# Altium PCB Monitor_Board_Model_H201.PcbDoc (part 3 of 5)
Units mm, origin at the board's own origin, x right, y up, seen from the top; angles counter-clockwise.
Board outline 50 x 40 mm, 6 copper layers (1-SIG-TOP, 2-GND, 3-PWR, 4-SIG-HOR, 5-SIG-VERT, 6-GND-BOT), stack 1.17 mm thick; 210 components, 140 nets, 699 pads, 51 vias.
Unrouted connection lines stored in the file: 491.
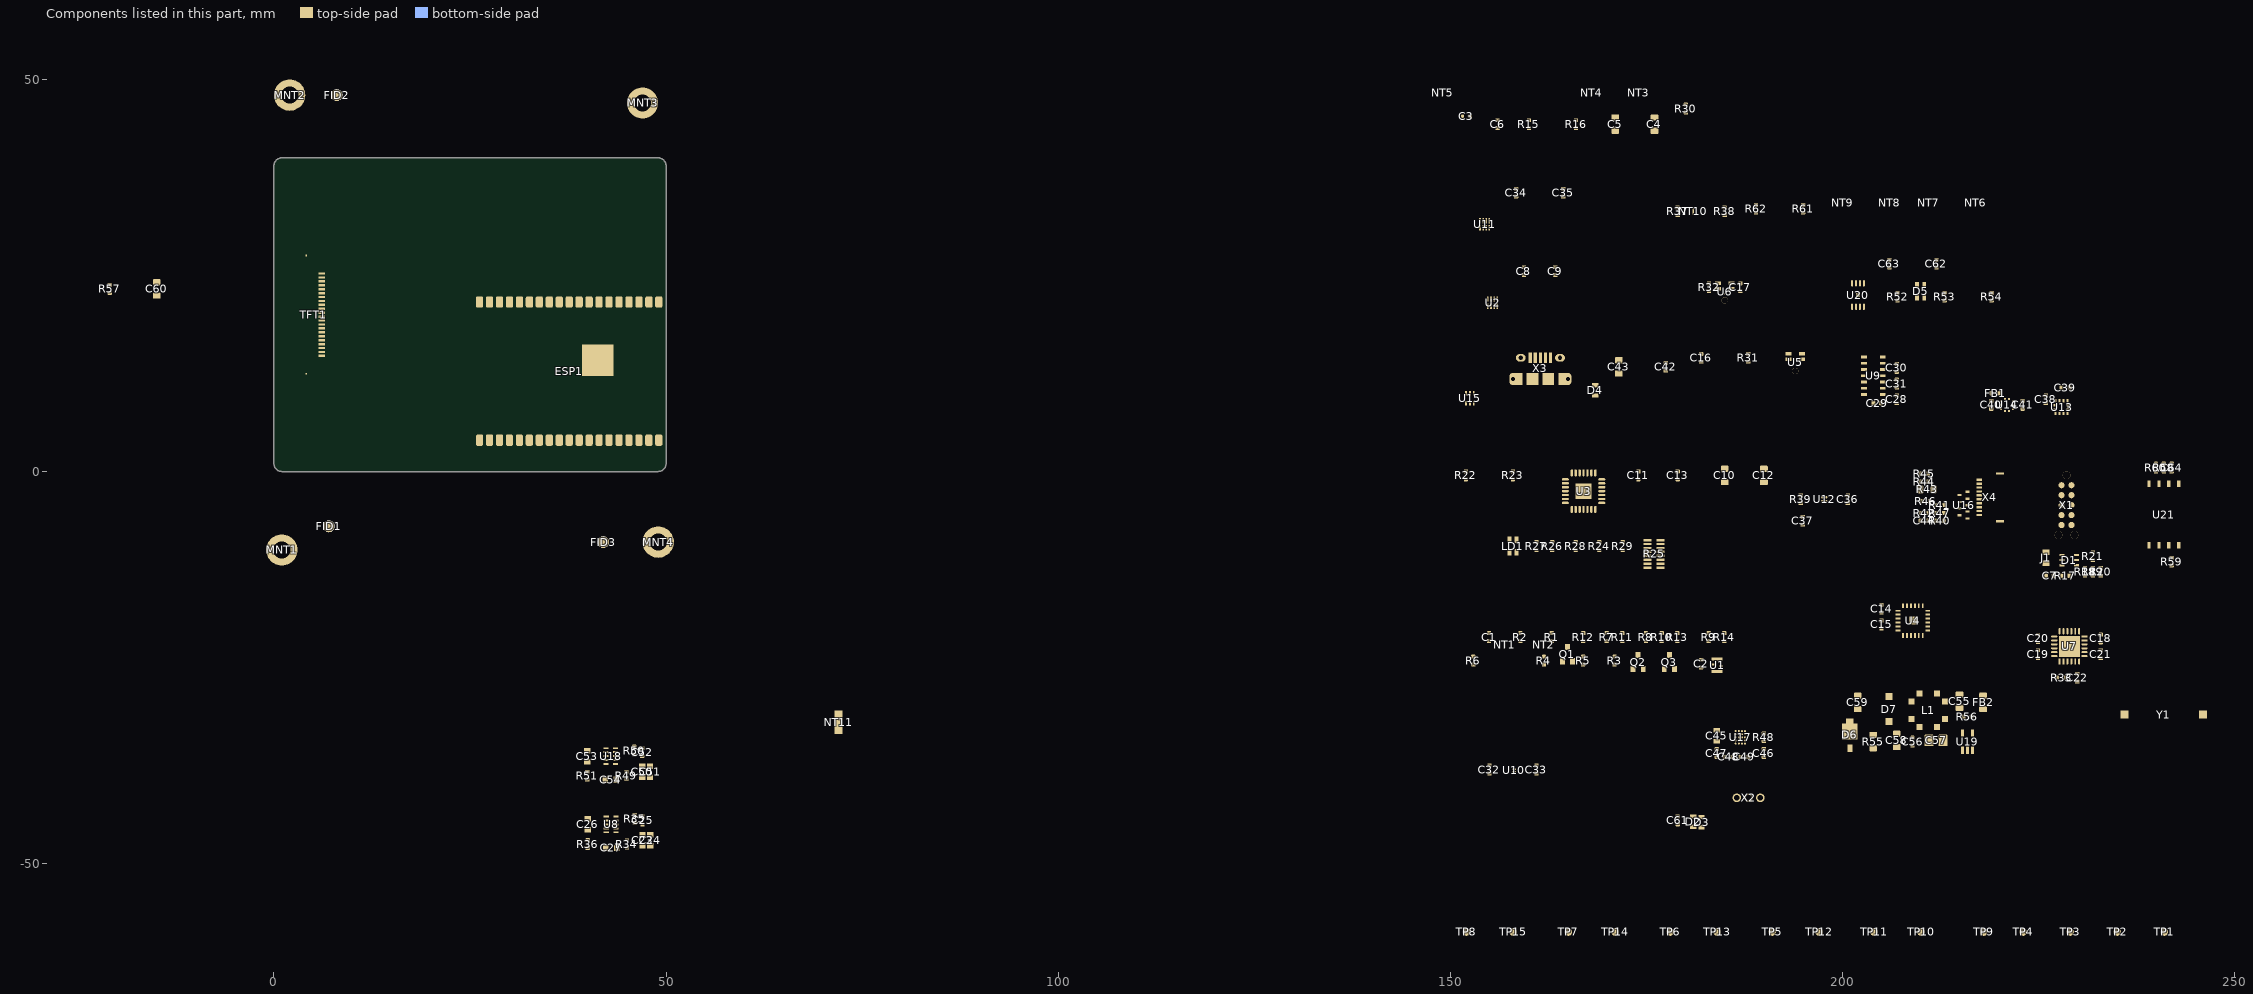
[diagram p6: the components of this part, seen from the top]

## Part data (continued)
R1: "0 Ohms Jumper 0.063W, 1/16W Chip Resistor 0402 (1005 Metric) Moisture Resistant Thick Film", Case/Package=0402, Case Code (Metric)=1005, Manufacturer=Yageo, Manufacturer Part Number=RC0402JR-070RL, Max Operating Temperature=155°C, Max Power Dissipation=63mW, Min Operating Temperature=-55°C, Package Quantity=1, Power Rating=62.5mW, Resistance="0 Ohm", Supplier Part Number 1=311-0.0JRCT-ND, Temperature Coefficient=200ppm/°C, Tolerance=5%, Voltage Rating=50V, Case Code (Imperial)=0402, ClassName=U_ESP32-WROOM32D_Module, ComponentLink1Description=http://www.yageo.com/documents/recent/PYu-RC_Group_51_RoHS_L_10.pdf?src-supplier=Digi-Key, ComponentLink1URL=http://www.yageo.com/documents/recent/PYu-RC_Group_51_RoHS_L_10.pdf?src-supplier=Digi-Key, ComponentLink2Description=http://www.yageo.com/documents/recent/PYu-RC0402_51_RoHS_L_6.pdf?src-supplier=Avnet+Europe, ComponentLink2URL=http://www.yageo.com/documents/recent/PYu-RC0402_51_RoHS_L_6.pdf?src-supplier=Avnet+Europe, ComponentLink3Description=http://www.farnell.com/datasheets/1018594.pdf?src-supplier=Element14, ComponentLink3URL=http://www.farnell.com/datasheets/1018594.pdf?src-supplier=Element14, ComponentLink4Description=https://www.verical.com/server-webapp/html/getDatasheet?partID=326379&src-supplier=Verical, ComponentLink4URL=https://www.verical.com/server-webapp/html/getDatasheet?partID=326379&src-supplier=Verical, ComponentLink5Description=http://www.farnell.com/datasheets/2167052.pdf?src-supplier=Element14, ComponentLink5URL=http://www.farnell.com/datasheets/2167052.pdf?src-supplier=Element14, Composition="Thick Film", Contact Plating=Tin,Matte, Depth=0.5mm, Features="Moisture Resistant", Height=0.016inch, Lead Free="Lead Free", Length=1mm, Military Standard=Not, Mount="Surface Mount", Number of Terminations=2, Packaging="Tape and Reel", Pricing 1="1=0.1, 10=0.013, 25=0.0092, 50=0.0072, 100=0.0053, 250=0.004, 500=0.0032, 1000=0.0024, 5000=0.0017 (USD)", Radiation Hardening=No, REACH SVHC=Unknown, Stock 1=46057148, Supplier 1=Digi-Key, Termination=SMD/SMT, Width=0.02inch
R2 R3 R4 R16 R26 R39 R40 R58 R59 R60: "10 kOhms ±1% 0.063W, 1/16W Chip Resistor 0402 (1005 Metric) Moisture Resistant Thick Film", Case/Package=0402, Case Code (Metric)=1005, Manufacturer=Yageo, Manufacturer Part Number=RC0402FR-0710KP, Max Operating Temperature=155°C, Max Power Dissipation=63mW, Min Operating Temperature=-55°C, Resistance=10kR, Supplier Part Number 1=YAG1249CT-ND, Temperature Coefficient=150ppm/°C, Tolerance=1%, Case Code (Imperial)=0402, ComponentLink1Description=http://www.yageo.com/NewPortal/yageodocoutput?fileName=/pdf/R-Chip/PYu-RC_51_RoHS_P_0.pdf&src-supplier=Digi-Key, ComponentLink1URL=http://www.yageo.com/NewPortal/yageodocoutput?fileName=/pdf/R-Chip/PYu-RC_51_RoHS_P_0.pdf&src-supplier=Digi-Key, Composition="Thick Film", Features="Moisture Resistant", Height=0.016inch, Length=0.039inch, Number of Terminations=2, Packaging="Tape and Reel", Pricing 1="1=0.1, 10=0.035, 100=0.014, 1000=0.0063, 2500=0.0055, 5000=0.0045 (USD)", Stock 1=839368, Supplier 1=Digi-Key, Width=0.02inch
  R2 R3 R4: ClassName=U_ESP32-WROOM32D_Module, Mount="Surface Mount"
  R16 R26 R39 R58 R59 R60: Mount="Surface Mount"
R5 R6 R15 R17 R18 R19 R20 R21 R30 R31 R32: "100 Ohms ±1% 0.063W, 1/16W Chip Resistor 0402 (1005 Metric) Moisture Resistant Thick Film", Case/Package=0402, Case Code (Metric)=1005, Manufacturer=Yageo, Manufacturer Part Number=RC0402FR-07100RL, Max Operating Temperature=155°C, Min Operating Temperature=-55°C, Power Rating=62.5mW, Resistance=100R, Supplier Part Number 1=311-100LRDKR-ND, Temperature Coefficient=100ppm/°C, Tolerance=1%, Voltage Rating=50V, Case Code (Imperial)=0402, ComponentLink1Description=http://www.farnell.com/datasheets/2167052.pdf?src-supplier=Element14, ComponentLink1URL=http://www.farnell.com/datasheets/2167052.pdf?src-supplier=Element14, ComponentLink2Description=http://www.yageo.com/documents/recent/PYu-RC_Group_51_RoHS_L_9.pdf?src-supplier=Mouser, ComponentLink2URL=http://www.yageo.com/documents/recent/PYu-RC_Group_51_RoHS_L_9.pdf?src-supplier=Mouser, ComponentLink3Description=http://www.yageo.com/documents/recent/PYu-RC0402_51_RoHS_L_6_r.pdf?src-supplier=Future+Electronics, ComponentLink3URL=http://www.yageo.com/documents/recent/PYu-RC0402_51_RoHS_L_6_r.pdf?src-supplier=Future+Electronics, ComponentLink4Description=https://www.verical.com/server-webapp/html/getDatasheet?partID=329466&src-supplier=Verical, ComponentLink4URL=https://www.verical.com/server-webapp/html/getDatasheet?partID=329466&src-supplier=Verical, ComponentLink5Description=http://www.farnell.com/datasheets/1018594.pdf?src-supplier=Element14, ComponentLink5URL=http://www.farnell.com/datasheets/1018594.pdf?src-supplier=Element14, ComponentLink6Description=http://documents.rs-components.com/techlib://itc_doclist_GB.htm?stockno=6185810&src-supplier=RSComponents, ComponentLink6URL=http://documents.rs-components.com/techlib://itc_doclist_GB.htm?stockno=6185810&src-supplier=RSComponents, Composition="Thick Film", Depth=0.5mm, Height=0.32mm, Lead Free="Lead Free", Length=1mm, Military Standard=Not, Number of Pins=2, Packaging="Tape and Reel", Pricing 1="1=0.1, 10=0.016, 100=0.0064, 1000=0.0029, 2500=0.0025, 5000=0.0021 (USD)", REACH SVHC="No SVHC", Stock 1=16989760, Supplier 1=Digi-Key, Termination=SMD/SMT, Voltage Rating (DC)=50V, Width=0.5mm
  R15 R17 R18 R19 R20 R21: Mount="Surface Mount"
R7 R8 R13 R14 R37 R38 R46: "2.7 kOhms ±1% 0.063W, 1/16W Chip Resistor 0402 (1005 Metric) Moisture Resistant Thick Film", Case/Package=0402, Case Code (Metric)=1005, Manufacturer=Yageo, Manufacturer Part Number=RC0402FR-072K7L, Max Operating Temperature=155°C, Max Power Dissipation=63mW, Min Operating Temperature=-55°C, Package Quantity=1, Resistance=2.7kR, Supplier Part Number 1=311-2.70KLRCT-ND, Temperature Coefficient=100ppm/°C, Tolerance=1%, Voltage Rating=50V, Case Code (Imperial)=0402, ComponentLink1Description=http://www.mouser.com/ds/2/447/PYu-RC0402_51_RoHS_L_6_r-8721.pdf?src-supplier=Mouser, ComponentLink1URL=http://www.mouser.com/ds/2/447/PYu-RC0402_51_RoHS_L_6_r-8721.pdf?src-supplier=Mouser, ComponentLink2Description=http://www.yageo.com/documents/recent/PYu-RC_Group_51_RoHS_L_9.pdf?src-supplier=Digi-Key, ComponentLink2URL=http://www.yageo.com/documents/recent/PYu-RC_Group_51_RoHS_L_9.pdf?src-supplier=Digi-Key, ComponentLink3Description=http://www.yageo.com/documents/recent/PYu-RC_Group_51_RoHS_L_10.pdf?src-supplier=Digi-Key, ComponentLink3URL=http://www.yageo.com/documents/recent/PYu-RC_Group_51_RoHS_L_10.pdf?src-supplier=Digi-Key, ComponentLink4Description=http://www.farnell.com/datasheets/2167052.pdf?src-supplier=Element14, ComponentLink4URL=http://www.farnell.com/datasheets/2167052.pdf?src-supplier=Element14, Composition="Thick Film", Depth=0.5mm, Features="Moisture Resistant", Height=0.016inch, Lead Free="Lead Free", Length=1mm, Military Standard=Not, Number of Terminations=2, Packaging="Tape and Reel", Power Rating=63mW, Pricing 1="1=0.1, 10=0.016, 100=0.0064, 1000=0.0029, 2500=0.0025, 5000=0.0021 (USD)", REACH SVHC=Unknown, Stock 1=261850, Supplier 1=Digi-Key, Termination=SMD/SMT, Width=0.02inch, Working Voltage=50V
  R7 R8 R13 R14 R37 R38: ClassName=U_ESP32-WROOM32D_Module
R9 R10 R11 R12: "100 kOhms ±1% 0.063W, 1/16W Chip Resistor 0402 (1005 Metric) Moisture Resistant Thick Film", Case/Package=0402, Case Code (Metric)=1005, Manufacturer=Yageo, Manufacturer Part Number=RC0402FR-07100KL, Max Operating Temperature=155°C, Max Power Dissipation=63mW, Min Operating Temperature=-55°C, Package Quantity=1, Resistance="100 kOhm", Supplier Part Number 1=311-100KLRDKR-ND, Temperature Coefficient=100ppm/°C, Tolerance=1%, Voltage Rating=50V, Case Code (Imperial)=0402, ComponentLink1Description=http://www.yageo.com/documents/recent/PYu-RC_Group_51_RoHS_L_10.pdf?src-supplier=Digi-Key, ComponentLink1URL=http://www.yageo.com/documents/recent/PYu-RC_Group_51_RoHS_L_10.pdf?src-supplier=Digi-Key, ComponentLink2Description=http://www.farnell.com/datasheets/1018594.pdf?src-supplier=Element14, ComponentLink2URL=http://www.farnell.com/datasheets/1018594.pdf?src-supplier=Element14, ComponentLink3Description=http://www.yageo.com/documents/recent/PYu-RC_Group_51_RoHS_L_9.pdf?src-supplier=Verical, ComponentLink3URL=http://www.yageo.com/documents/recent/PYu-RC_Group_51_RoHS_L_9.pdf?src-supplier=Verical, ComponentLink4Description=http://www.yageo.com/documents/recent/PYu-RC_Group_51_RoHS_L_9.pdf?src-supplier=Mouser, ComponentLink4URL=http://www.yageo.com/documents/recent/PYu-RC_Group_51_RoHS_L_9.pdf?src-supplier=Mouser, ComponentLink5Description=http://documents.rs-components.com/techlib://itc_doclist_GB.htm?stockno=6185797&src-supplier=RSComponents, ComponentLink5URL=http://documents.rs-components.com/techlib://itc_doclist_GB.htm?stockno=6185797&src-supplier=RSComponents, Composition="Thick Film", Depth=0.5mm, Features="Moisture Resistant", Height=0.016inch, Lead Free="Lead Free", Length=0.039inch, Military Standard=Not, Number of Terminations=2, Packaging="Tape and Reel", Power Rating=63mW, Pricing 1="1=0.1, 10=0.016, 100=0.0064, 1000=0.0029, 2500=0.0025, 5000=0.0021 (USD)", REACH SVHC="No SVHC", Stock 1=47448883, Supplier 1=Digi-Key, Termination=SMD/SMT, Width=0.02inch, Working Voltage=50V
R22: "47 kOhms ±1% 0.063W, 1/16W Chip Resistor 0402 (1005 Metric) Moisture Resistant Thick Film", Case/Package=0402, Case Code (Metric)=1005, Manufacturer=Yageo, Manufacturer Part Number=RC0402FR-0747KL, Max Operating Temperature=155°C, Max Power Dissipation=63mW, Min Operating Temperature=-55°C, Package Quantity=1, Power Rating=62.5mW, Resistance=47kR, Supplier Part Number 1=311-47.0KLRCT-ND, Temperature Coefficient=100ppm/°C, Tolerance=1%, Voltage Rating=50V, Case Code (Imperial)=0402, ComponentLink1Description=http://www.yageo.com/documents/recent/PYu-RC0402_51_RoHS_L_6_r.pdf?src-supplier=Future+Electronics, ComponentLink1URL=http://www.yageo.com/documents/recent/PYu-RC0402_51_RoHS_L_6_r.pdf?src-supplier=Future+Electronics, ComponentLink2Description=http://www.farnell.com/datasheets/1018594.pdf?src-supplier=Element14, ComponentLink2URL=http://www.farnell.com/datasheets/1018594.pdf?src-supplier=Element14, ComponentLink3Description=https://www.verical.com/server-webapp/html/getDatasheet?partID=323748&src-supplier=Verical, ComponentLink3URL=https://www.verical.com/server-webapp/html/getDatasheet?partID=323748&src-supplier=Verical, ComponentLink4Description=http://www.yageo.com/documents/recent/PYu-RC_Group_51_RoHS_L_10.pdf?src-supplier=Digi-Key, ComponentLink4URL=http://www.yageo.com/documents/recent/PYu-RC_Group_51_RoHS_L_10.pdf?src-supplier=Digi-Key, Composition="Thick Film", Depth=0.5mm, Features="Moisture Resistant", Height=0.016inch, Lead Free="Lead Free", Length=1mm, Military Standard=Not, Mount="Surface Mount", Number of Terminations=2, Packaging="Tape and Reel", Pricing 1="1=0.1, 10=0.015, 100=0.0062, 1000=0.0028, 2500=0.0024, 5000=0.002 (USD)", REACH SVHC=Unknown, Stock 1=0, Supplier 1=Digi-Key, Termination=SMD/SMT, Width=0.5mm
R23: "23.7 kOhms ±1% 0.063W, 1/16W Chip Resistor 0402 (1005 Metric) Moisture Resistant Thick Film", Case/Package=0402, Case Code (Metric)=1005, Manufacturer=Yageo, Manufacturer Part Number=RC0402FR-0723K7L, Max Operating Temperature=155°C, Max Power Dissipation=63mW, Min Operating Temperature=-55°C, Power Rating=62.5mW, Resistance=23.7kR, Supplier Part Number 1=YAG3067CT-ND, Temperature Coefficient=100ppm/°C, Tolerance=1%, Voltage Rating=50V, Case Code (Imperial)=0402, ComponentLink1Description=http://www.yageo.com/documents/recent/PYu-RC0402_51_RoHS_L_6.pdf?src-supplier=Avnet+Europe, ComponentLink1URL=http://www.yageo.com/documents/recent/PYu-RC0402_51_RoHS_L_6.pdf?src-supplier=Avnet+Europe, ComponentLink2Description=https://www.verical.com/server-webapp/html/getDatasheet?partID=325115&src-supplier=Verical, ComponentLink2URL=https://www.verical.com/server-webapp/html/getDatasheet?partID=325115&src-supplier=Verical, ComponentLink3Description=http://www.mouser.com/ds/2/447/PYu-RC0402_51_RoHS_L_6_r-8721.pdf?src-supplier=Mouser, ComponentLink3URL=http://www.mouser.com/ds/2/447/PYu-RC0402_51_RoHS_L_6_r-8721.pdf?src-supplier=Mouser, ComponentLink4Description=http://www.yageo.com/documents/recent/PYu-RC0402_51_RoHS_L_6.pdf?src-supplier=Avnet, ComponentLink4URL=http://www.yageo.com/documents/recent/PYu-RC0402_51_RoHS_L_6.pdf?src-supplier=Avnet, Composition="Thick Film", Contact Plating=Tin,Matte, Depth=0.5mm, Features="Moisture Resistant", Height=0.016inch, Lead Free="Lead Free", Length=1mm, Military Standard=Not, Mount="Surface Mount", Number of Terminations=2, Packaging="Tape and Reel", Pricing 1="1=0.1, 10=0.016, 100=0.0064, 1000=0.0029, 2500=0.0025, 5000=0.0021 (USD)", Radiation Hardening=No, Stock 1=58499, Supplier 1=Digi-Key, Termination=SMD/SMT, Voltage Rating (DC)=50V, Weight=2.3E-05oz, Width=0.02inch
R24 R47 R57: "1 kOhms ±1% 0.063W, 1/16W Chip Resistor 0402 (1005 Metric) Moisture Resistant Thick Film", Case/Package=0402, Case Code (Metric)=1005, Manufacturer=Yageo, Manufacturer Part Number=RC0402FR-071KL, Max Operating Temperature=155°C, Min Operating Temperature=-55°C, Power Rating=62.5mW, Resistance=1kR, Supplier Part Number 1=311-1.00KLRCT-ND, Temperature Coefficient=100ppm/°C, Tolerance=1%, Voltage Rating=50V, Case Code (Imperial)=0402, ComponentLink1Description=http://www.mouser.com/ds/2/447/PYu-RC0402_51_RoHS_L_6_r-8721.pdf?src-supplier=Mouser, ComponentLink1URL=http://www.mouser.com/ds/2/447/PYu-RC0402_51_RoHS_L_6_r-8721.pdf?src-supplier=Mouser, ComponentLink2Description=http://documents.rs-components.com/techlib://itc_doclist_GB.htm?stockno=6186122&src-supplier=RSComponents, ComponentLink2URL=http://documents.rs-components.com/techlib://itc_doclist_GB.htm?stockno=6186122&src-supplier=RSComponents, ComponentLink3Description=http://www.farnell.com/datasheets/1018594.pdf?src-supplier=Element14, ComponentLink3URL=http://www.farnell.com/datasheets/1018594.pdf?src-supplier=Element14, ComponentLink4Description=http://www.yageo.com/documents/recent/PYu-RC0402_51_RoHS_L_6_r.pdf?src-supplier=Future+Electronics, ComponentLink4URL=http://www.yageo.com/documents/recent/PYu-RC0402_51_RoHS_L_6_r.pdf?src-supplier=Future+Electronics, ComponentLink5Description=http://www.farnell.com/datasheets/2167052.pdf?src-supplier=Element14, ComponentLink5URL=http://www.farnell.com/datasheets/2167052.pdf?src-supplier=Element14, Composition="Thick Film", Depth=0.5mm, Height=0.32mm, Lead Free="Lead Free", Length=1mm, Military Standard=Not, Number of Pins=2, Packaging="Tape and Reel", Pricing 1="1=0.1, 10=0.015, 100=0.0062, 1000=0.0028, 2500=0.0024, 5000=0.002 (USD)", REACH SVHC=Unknown, Stock 1=9574509, Supplier 1=Digi-Key, Termination=SMD/SMT, Voltage Rating (DC)=50V, Width=0.5mm
  R57: Mount="Surface Mount"
R25: "100k Ohm ±5% 62.5mW Power Per Element Isolated  Resistor Network/Array ±200ppm/°C 1606, Convex, Long Side Terminals", Case/Package=0616, Case Code (Metric)=1640, Manufacturer=Yageo, Manufacturer Part Number=YC248-JR-07100KL, Max Operating Temperature=155°C, Min Operating Temperature=-55°C, Number of Resistors=8, Package Quantity=1, Power Per Element=62.5mW, Resistance=100kR, Supplier Part Number 1=YC248J-100KCT-ND, Temperature Coefficient=200ppm/°C, Tolerance=5%, Voltage Rating=50V, Case Code (Imperial)=0616, Circuit Type=Isolated, ComponentLink1Description=https://media.digikey.com/pdf/Data%20Sheets/Yageo%20PDFs/YC102-358,TC122-164_Series_DS.pdf?src-supplier=Digi-Key, ComponentLink1URL=https://media.digikey.com/pdf/Data%20Sheets/Yageo%20PDFs/YC102-358,TC122-164_Series_DS.pdf?src-supplier=Digi-Key, ComponentLink2Description=http://www.yageo.com/documents/recent/PYu-YC248_51_RoHS_L_2.pdf?src-supplier=Digi-Key, ComponentLink2URL=http://www.yageo.com/documents/recent/PYu-YC248_51_RoHS_L_2.pdf?src-supplier=Digi-Key, ComponentLink3Description=http://www.yageo.com/NewPortal/yageodocoutput?fileName=/pdf/R-Chip/PYu-YC_TC_group_51_RoHS_L_0.pdf&src-supplier=Digi-Key, ComponentLink3URL=http://www.yageo.com/NewPortal/yageodocoutput?fileName=/pdf/R-Chip/PYu-YC_TC_group_51_RoHS_L_0.pdf&src-supplier=Digi-Key, ComponentLink4Description=http://www.yageo.com/documents/recent/PYu-YC248_51_RoHS_L_(2).pdf?src-supplier=Avnet+Europe, ComponentLink4URL=http://www.yageo.com/documents/recent/PYu-YC248_51_RoHS_L_(2).pdf?src-supplier=Avnet+Europe, ComponentLink5Description=http://www.farnell.com/datasheets/443139.pdf?src-supplier=Element14, ComponentLink5URL=http://www.farnell.com/datasheets/443139.pdf?src-supplier=Element14, Composition="Thick Film", Depth=1.6mm, Height=0.022inch, Lead Free="Lead Free", Length=0.157inch, Military Standard=Not, Mount="Surface Mount", Number of Circuits=8, Number of Contacts=16, Number of Elements=8, Number of Pins=16, Number of Terminals=16, Packaging="Tape and Reel", Power Rating=62.5mW, Pricing 1="1=0.3, 10=0.251, 25=0.1828, 50=0.1324, 100=0.0982, 250=0.0754, 500=0.0594, 1000=0.0411 (USD)", Radiation Hardening=No, REACH SVHC="No SVHC", Stock 1=5800, Supplier 1=Digi-Key, Terminal Pitch=0.5mm, Termination=Convex, Voltage Rating (DC)=50V, Width=0.063inch
R27 R28 R29 R52 R53 R54: "402 Ohms ±1% 0.063W, 1/16W Chip Resistor 0402 (1005 Metric) Moisture Resistant Thick Film", Case/Package=0402, Case Code (Metric)=1005, Manufacturer=Yageo, Manufacturer Part Number=RC0402FR-07402RL, Max Operating Temperature=155°C, Max Power Dissipation=63mW, Min Operating Temperature=-55°C, Power Rating=62.5mW, Resistance=402R, Supplier Part Number 1=YAG3152CT-ND, Temperature Coefficient=100ppm/°C, Tolerance=1%, Voltage Rating=50V, Case Code (Imperial)=0402, ComponentLink1Description=http://www.yageo.com/documents/recent/PYu-RC0402_51_RoHS_L_6.pdf?src-supplier=Avnet, ComponentLink1URL=http://www.yageo.com/documents/recent/PYu-RC0402_51_RoHS_L_6.pdf?src-supplier=Avnet, ComponentLink2Description=http://www.yageo.com/documents/recent/PYu-RC0402_51_RoHS_L_6.pdf?src-supplier=Avnet+Europe, ComponentLink2URL=http://www.yageo.com/documents/recent/PYu-RC0402_51_RoHS_L_6.pdf?src-supplier=Avnet+Europe, ComponentLink3Description=http://www.mouser.com/ds/2/447/PYu-RC0402_51_RoHS_L_6_r-8721.pdf?src-supplier=Mouser, ComponentLink3URL=http://www.mouser.com/ds/2/447/PYu-RC0402_51_RoHS_L_6_r-8721.pdf?src-supplier=Mouser, Composition="Thick Film", Contact Plating=Tin,Matte, Depth=0.5mm, Features="Moisture Resistant", Height=0.016inch, Lead Free="Lead Free", Length=0.039inch, Military Standard=Not, Mount="Surface Mount", Number of Terminations=2, Packaging="Tape and Reel", Pricing 1="1=0.1, 10=0.016, 100=0.0064, 1000=0.0029, 2500=0.0025, 5000=0.0021 (USD)", Stock 1=0, Supplier 1=Digi-Key, Termination=SMD/SMT, Width=0.02inch
R33 R56: "63.4 kOhms ±1% 0.063W, 1/16W Chip Resistor 0402 (1005 Metric) Moisture Resistant Thick Film", Case/Package=0402, Case Code (Metric)=1005, Manufacturer=Yageo, Manufacturer Part Number=RC0402FR-0763K4L, Max Operating Temperature=155°C, Max Power Dissipation=63mW, Min Operating Temperature=-55°C, Power Rating=62.5mW, Resistance=63.4kR, Supplier Part Number 1=YAG3204CT-ND, Temperature Coefficient=100ppm/°C, Tolerance=1%, Voltage Rating=50V, Case Code (Imperial)=0402, ComponentLink1Description=http://www.yageo.com/documents/recent/PYu-RC0402_51_RoHS_L_6.pdf?src-supplier=Avnet+Europe, ComponentLink1URL=http://www.yageo.com/documents/recent/PYu-RC0402_51_RoHS_L_6.pdf?src-supplier=Avnet+Europe, ComponentLink2Description=http://www.yageo.com/documents/recent/PYu-RC0402_51_RoHS_L_6_r.pdf?src-supplier=Future+Electronics, ComponentLink2URL=http://www.yageo.com/documents/recent/PYu-RC0402_51_RoHS_L_6_r.pdf?src-supplier=Future+Electronics, ComponentLink3Description=http://www.yageo.com/documents/recent/PYu-RC0402_51_RoHS_L_6.pdf?src-supplier=Avnet, ComponentLink3URL=http://www.yageo.com/documents/recent/PYu-RC0402_51_RoHS_L_6.pdf?src-supplier=Avnet, Composition="Thick Film", Contact Plating=Tin,Matte, Depth=0.5mm, Features="Moisture Resistant", Height=0.016inch, Lead Free="Lead Free", Length=1mm, Military Standard=Not, Number of Terminations=2, Packaging="Tape and Reel", Pricing 1="1=0.1, 10=0.015, 100=0.0062, 1000=0.0028, 2500=0.0024, 5000=0.002 (USD)", Stock 1=453897, Supplier 1=Digi-Key, Termination=SMD/SMT, Width=0.02inch
  R56: Mount="Surface Mount"
R34 R49: "910 kOhms ±1% 0.063W, 1/16W Chip Resistor 0402 (1005 Metric) Moisture Resistant Thick Film", Case/Package=0402, Case Code (Metric)=1005, Manufacturer=Yageo, Manufacturer Part Number=RC0402FR-07910KL, Max Operating Temperature=155°C, Max Power Dissipation=63mW, Min Operating Temperature=-55°C, Power Rating=62.5mW, Resistance=910kR, Supplier Part Number 1=YAG3257CT-ND, Temperature Coefficient=100ppm/°C, Tolerance=1%, Voltage Rating=50V, Case Code (Imperial)=0402, ComponentLink1Description=http://www.yageo.com/documents/recent/PYu-RC0402_51_RoHS_L_6.pdf?src-supplier=Avnet+Europe, ComponentLink1URL=http://www.yageo.com/documents/recent/PYu-RC0402_51_RoHS_L_6.pdf?src-supplier=Avnet+Europe, ComponentLink2Description=https://www.verical.com/server-webapp/html/getDatasheet?partID=741075&src-supplier=Verical, ComponentLink2URL=https://www.verical.com/server-webapp/html/getDatasheet?partID=741075&src-supplier=Verical, ComponentLink3Description=http://www.yageo.com/documents/recent/PYu-RC0402_51_RoHS_L_6.pdf?src-supplier=Avnet, ComponentLink3URL=http://www.yageo.com/documents/recent/PYu-RC0402_51_RoHS_L_6.pdf?src-supplier=Avnet, Composition="Thick Film", Contact Plating=Tin,Matte, Depth=0.5mm, Features="Moisture Resistant", Height=0.016inch, Lead Free="Lead Free", Length=1mm, Military Standard=Not, Number of Terminations=2, Packaging="Tape and Reel", Pricing 1="1=0.1, 10=0.015, 100=0.0062, 1000=0.0028, 2500=0.0024, 5000=0.002 (USD)", REACH SVHC=Unknown, Stock 1=96210, Supplier 1=Digi-Key, Termination=SMD/SMT, Voltage Rating (DC)=50V, Width=0.5mm
R35 R50: "390 kOhms ±1% 0.063W, 1/16W Chip Resistor 0402 (1005 Metric) Moisture Resistant Thick Film", Case/Package=0402, Case Code (Metric)=1005, Manufacturer=Yageo, Manufacturer Part Number=RC0402FR-07390KL, Max Operating Temperature=155°C, Max Power Dissipation=63mW, Min Operating Temperature=-55°C, Power Rating=62.5mW, Resistance=390kR, Supplier Part Number 1=YAG3143CT-ND, Temperature Coefficient=100ppm/°C, Tolerance=1%, Voltage Rating=50V, Case Code (Imperial)=0402, ComponentLink1Description=http://www.yageo.com/documents/recent/PYu-RC0402_51_RoHS_L_6.pdf?src-supplier=Future+Electronics, ComponentLink1URL=http://www.yageo.com/documents/recent/PYu-RC0402_51_RoHS_L_6.pdf?src-supplier=Future+Electronics, ComponentLink2Description=http://www.farnell.com/datasheets/2167052.pdf?src-supplier=Element14, ComponentLink2URL=http://www.farnell.com/datasheets/2167052.pdf?src-supplier=Element14, ComponentLink3Description=http://www.mouser.com/ds/2/447/PYu-RC0402_51_RoHS_L_6_r-8721.pdf?src-supplier=Mouser, ComponentLink3URL=http://www.mouser.com/ds/2/447/PYu-RC0402_51_RoHS_L_6_r-8721.pdf?src-supplier=Mouser, Composition="Thick Film", Depth=0.5mm, Features="Moisture Resistant", Height=0.016inch, Lead Free="Lead Free", Length=1mm, Military Standard=Not, Number of Terminations=2, Packaging="Tape and Reel", Pricing 1="1=0.1, 10=0.016, 100=0.0064, 1000=0.0029, 2500=0.0025, 5000=0.0021 (USD)", REACH SVHC=Unknown, Stock 1=118017, Supplier 1=Digi-Key, Termination=SMD/SMT, Weight=2.3E-05oz, Width=0.02inch
R36 R51: "88.7 kOhms ±1% 0.063W, 1/16W Chip Resistor 0402 (1005 Metric) Moisture Resistant Thick Film", Case/Package=0402, Case Code (Metric)=1005, Manufacturer=Yageo, Manufacturer Part Number=RC0402FR-0788K7L, Max Operating Temperature=155°C, Min Operating Temperature=-55°C, Power Rating=62.5mW, Resistance=88.7kR, Supplier Part Number 1=311-88.7KLRCT-ND, Temperature Coefficient=100ppm/°C, Tolerance=1%, Voltage Rating=50V, Case Code (Imperial)=0402, ComponentLink1Description=http://www.yageo.com/documents/recent/PYu-RC0402_51_RoHS_L_6.pdf?src-supplier=Avnet+Europe, ComponentLink1URL=http://www.yageo.com/documents/recent/PYu-RC0402_51_RoHS_L_6.pdf?src-supplier=Avnet+Europe, ComponentLink2Description=http://www.yageo.com/documents/recent/PYu-RC0402_51_RoHS_L_6_r.pdf?src-supplier=Future+Electronics, ComponentLink2URL=http://www.yageo.com/documents/recent/PYu-RC0402_51_RoHS_L_6_r.pdf?src-supplier=Future+Electronics, ComponentLink3Description=http://www.yageo.com/documents/recent/PYu-RC0402_51_RoHS_L_6.pdf?src-supplier=Avnet, ComponentLink3URL=http://www.yageo.com/documents/recent/PYu-RC0402_51_RoHS_L_6.pdf?src-supplier=Avnet, Composition="Thick Film", Contact Plating=Tin,Matte, Depth=0.5mm, Height=0.35mm, Lead Free="Lead Free", Length=1mm, Military Standard=Not, Packaging="Tape and Reel", Pricing 1="1=0.1, 10=0.016, 100=0.0064, 1000=0.0029, 2500=0.0025, 5000=0.0021 (USD)", Stock 1=136150, Supplier 1=Digi-Key, Termination=SMD/SMT, Voltage Rating (DC)=50V, Width=0.5mm
R41: "18.2 kOhms ±1% 0.063W, 1/16W Chip Resistor 0402 (1005 Metric) Moisture Resistant Thick Film", Case/Package=0402, Case Code (Metric)=1005, Manufacturer=Yageo, Manufacturer Part Number=RC0402FR-0718K2L, Max Operating Temperature=155°C, Max Power Dissipation=63mW, Min Operating Temperature=-55°C, Package Quantity=10000, Power Rating=62.5mW, Resistance=18.2kR, Supplier Part Number 1=YAG2371CT-ND, Temperature Coefficient=100ppm/°C, Tolerance=1%, Voltage Rating=50V, Case Code (Imperial)=0402, ComponentLink1Description=http://www.yageo.com/documents/recent/PYu-RC0402_51_RoHS_L_6_r.pdf?src-supplier=Future+Electronics, ComponentLink1URL=http://www.yageo.com/documents/recent/PYu-RC0402_51_RoHS_L_6_r.pdf?src-supplier=Future+Electronics, ComponentLink2Description=http://www.yageo.com.tw/exep/pages/download/literatures/PYu-R_INT-thick_7.pdf?src-supplier=Digi-Key, ComponentLink2URL=http://www.yageo.com.tw/exep/pages/download/literatures/PYu-R_INT-thick_7.pdf?src-supplier=Digi-Key, ComponentLink3Description=http://www.mouser.com/ds/2/447/PYu-RC0402_51_RoHS_L_6_r-8721.pdf?src-supplier=Mouser, ComponentLink3URL=http://www.mouser.com/ds/2/447/PYu-RC0402_51_RoHS_L_6_r-8721.pdf?src-supplier=Mouser, ComponentLink4Description=http://www.yageo.com/documents/recent/PYu-RC0402_51_RoHS_L_6.pdf?src-supplier=Avnet+Europe, ComponentLink4URL=http://www.yageo.com/documents/recent/PYu-RC0402_51_RoHS_L_6.pdf?src-supplier=Avnet+Europe, Composition="Thick Film", Contact Plating=Tin,Lead,Matte, Depth=0.5mm, Features="Moisture Resistant", Height=0.016inch, Lead Free="Lead Free", Length=1mm, Military Standard=Not, Number of Terminations=2, Packaging="Tape and Reel", Pricing 1="1=0.1, 10=0.015, 100=0.0062, 1000=0.0028, 2500=0.0024, 5000=0.002 (USD)", Radiation Hardening=No, Stock 1=372233, Supplier 1=Digi-Key, Termination=SMD/SMT, Voltage Rating (DC)=50V, Width=0.02inch, Working Voltage=50V
R42: "11 kOhms ±1% 0.063W, 1/16W Chip Resistor 0402 (1005 Metric) Moisture Resistant Thick Film", Case/Package=0402, Case Code (Metric)=1005, Manufacturer=Yageo, Manufacturer Part Number=RC0402FR-0711KL, Max Operating Temperature=155°C, Max Power Dissipation=63mW, Min Operating Temperature=-55°C, Package Quantity=1, Resistance=11kR, Supplier Part Number 1=311-11.0KLRCT-ND, Temperature Coefficient=100ppm/°C, Tolerance=1%, Voltage Rating=50V, Case Code (Imperial)=0402, ComponentLink1Description=http://www.yageo.com/documents/recent/PYu-RC_Group_51_RoHS_L_10.pdf?src-supplier=Digi-Key, ComponentLink1URL=http://www.yageo.com/documents/recent/PYu-RC_Group_51_RoHS_L_10.pdf?src-supplier=Digi-Key, ComponentLink2Description=http://www.yageo.com/documents/recent/PYu-RC_Group_51_RoHS_L_9.pdf?src-supplier=Digi-Key, ComponentLink2URL=http://www.yageo.com/documents/recent/PYu-RC_Group_51_RoHS_L_9.pdf?src-supplier=Digi-Key, ComponentLink3Description=http://www.mouser.com/ds/2/447/PYu-RC0402_51_RoHS_L_6_r-8721.pdf?src-supplier=Mouser, ComponentLink3URL=http://www.mouser.com/ds/2/447/PYu-RC0402_51_RoHS_L_6_r-8721.pdf?src-supplier=Mouser, ComponentLink4Description=http://www.farnell.com/datasheets/1018594.pdf?src-supplier=Farnell, ComponentLink4URL=http://www.farnell.com/datasheets/1018594.pdf?src-supplier=Farnell, Composition="Thick Film", Depth=0.5mm, Features="Moisture Resistant", Height=0.016inch, Lead Free="Lead Free", Length=0.039inch, Military Standard=Not, Number of Pins=2, Number of Terminations=2, Packaging="Tape and Reel", Power Rating=63mW, Pricing 1="1=0.1, 10=0.015, 100=0.0062, 1000=0.0028, 2500=0.0024, 5000=0.002 (USD)", REACH SVHC="No SVHC", Stock 1=632376, Supplier 1=Digi-Key, Termination=SMD/SMT, Voltage Rating (DC)=50V, Width=0.02inch
R43: "7.5 kOhms ±1% 0.1W, 1/10W Chip Resistor 0603 (1608 Metric) Moisture Resistant Thick Film", Case/Package=0603, Case Code (Metric)=1608, Manufacturer=Yageo, Manufacturer Part Number=RC0603FR-077K5L, Max Operating Temperature=155°C, Max Power Dissipation=100mW, Min Operating Temperature=-55°C, Package Quantity=1, Resistance="7.5 kOhm", Supplier Part Number 1=311-7.50KHRCT-ND, Temperature Coefficient=100ppm/°C, Tolerance=1%, Voltage Rating=50V, Working Voltage=75V, Case Code (Imperial)=0603, ComponentLink1Description=http://www.yageo.com/documents/recent/PYu-RC_Group_51_RoHS_L_10.pdf?src-supplier=Digi-Key, ComponentLink1URL=http://www.yageo.com/documents/recent/PYu-RC_Group_51_RoHS_L_10.pdf?src-supplier=Digi-Key, ComponentLink2Description=http://www.mouser.com/catalog/specsheets/RC0603.pdf?src-supplier=Mouser, ComponentLink2URL=http://www.mouser.com/catalog/specsheets/RC0603.pdf?src-supplier=Mouser, ComponentLink3Description=http://www.farnell.com/datasheets/443971.pdf?src-supplier=Element14, ComponentLink3URL=http://www.farnell.com/datasheets/443971.pdf?src-supplier=Element14, ComponentLink4Description=https://www.verical.com/server-webapp/html/getDatasheet?partID=326523&src-supplier=Verical, ComponentLink4URL=https://www.verical.com/server-webapp/html/getDatasheet?partID=326523&src-supplier=Verical, Composition="Thick Film", Depth=0.8mm, Features="Moisture Resistant", Height=0.45mm, Lead Free="Lead Free", Length=1.6mm, Military Standard=Not, Number of Pins=2, Number of Terminations=2, Packaging="Tape and Reel", Power Rating=100mW, Pricing 1="1=0.1, 10=0.023, 100=0.0094, 1000=0.0042, 2500=0.0037 (USD)", REACH SVHC="No SVHC", Stock 1=1778854, Supplier 1=Digi-Key, Termination=SMD/SMT, Voltage Rating (DC)=50V, Width=0.031inch
R44: "5.36 kOhms ±1% 0.063W, 1/16W Chip Resistor 0402 (1005 Metric) Moisture Resistant Thick Film", Case/Package=0402, Case Code (Metric)=1005, Manufacturer=Yageo, Manufacturer Part Number=RC0402FR-075K36L, Max Operating Temperature=155°C, Max Power Dissipation=63mW, Min Operating Temperature=-55°C, Package Quantity=1, Power Rating=62.5mW, Resistance=5.36kR, Supplier Part Number 1=311-5.36KLRCT-ND, Temperature Coefficient=100ppm/°C, Tolerance=1%, Voltage Rating=50V, Case Code (Imperial)=0402, ComponentLink1Description=https://www.verical.com/server-webapp/html/getDatasheet?partID=314179&src-supplier=Verical, ComponentLink1URL=https://www.verical.com/server-webapp/html/getDatasheet?partID=314179&src-supplier=Verical, ComponentLink2Description=http://www.yageo.com/pdf/PYu-RC0402_51_RoHS_L_4.pdf?src-supplier=Avnet, ComponentLink2URL=http://www.yageo.com/pdf/PYu-RC0402_51_RoHS_L_4.pdf?src-supplier=Avnet, ComponentLink3Description=http://www.yageo.com/documents/recent/PYu-RC_Group_51_RoHS_L_10.pdf?src-supplier=Digi-Key, ComponentLink3URL=http://www.yageo.com/documents/recent/PYu-RC_Group_51_RoHS_L_10.pdf?src-supplier=Digi-Key, ComponentLink4Description=http://www.yageo.com/documents/recent/PYu-RC0402_51_RoHS_L_6_r.pdf?src-supplier=Mouser, ComponentLink4URL=http://www.yageo.com/documents/recent/PYu-RC0402_51_RoHS_L_6_r.pdf?src-supplier=Mouser, ComponentLink5Description=http://www.yageo.com/documents/recent/PYu-RC0402_51_RoHS_L_6.pdf?src-supplier=Avnet+Europe, ComponentLink5URL=http://www.yageo.com/documents/recent/PYu-RC0402_51_RoHS_L_6.pdf?src-supplier=Avnet+Europe, Composition="Thick Film", Contact Plating=Tin,Lead,Matte, Depth=0.5mm, Features="Moisture Resistant", Height=0.016inch, Lead Free="Lead Free", Length=1mm, Military Standard=Not, Number of Terminations=2, Packaging="Tape and Reel", Pricing 1="1=0.1, 10=0.016, 100=0.0064, 1000=0.0029, 2500=0.0025, 5000=0.0021 (USD)", Radiation Hardening=No, Stock 1=170749, Supplier 1=Digi-Key, Termination=SMD/SMT, Voltage Rating (DC)=50V, Width=0.02inch
R45: library part "RES SMD 2.7K OHM 1% 1/16W 0402", "2.7 kOhms ±1% 0.063W, 1/16W Chip Resistor 0402 (1005 Metric) Moisture Resistant Thick Film", Case/Package=0402, Case Code (Metric)=1005, Manufacturer=Yageo, Max Operating Temperature=155°C, Max Power Dissipation=63mW, Min Operating Temperature=-55°C, Package Quantity=1, Resistance=2.7kR, Supplier Part Number 1=311-2.70KLRCT-ND, Temperature Coefficient=100ppm/°C, Tolerance=1%, Voltage Rating=50V, Case Code (Imperial)=0402, ComponentLink1Description=http://www.mouser.com/ds/2/447/PYu-RC0402_51_RoHS_L_6_r-8721.pdf?src-supplier=Mouser, ComponentLink1URL=http://www.mouser.com/ds/2/447/PYu-RC0402_51_RoHS_L_6_r-8721.pdf?src-supplier=Mouser, ComponentLink2Description=http://www.yageo.com/documents/recent/PYu-RC_Group_51_RoHS_L_9.pdf?src-supplier=Digi-Key, ComponentLink2URL=http://www.yageo.com/documents/recent/PYu-RC_Group_51_RoHS_L_9.pdf?src-supplier=Digi-Key, ComponentLink3Description=http://www.yageo.com/documents/recent/PYu-RC_Group_51_RoHS_L_10.pdf?src-supplier=Digi-Key, ComponentLink3URL=http://www.yageo.com/documents/recent/PYu-RC_Group_51_RoHS_L_10.pdf?src-supplier=Digi-Key, ComponentLink4Description=http://www.farnell.com/datasheets/2167052.pdf?src-supplier=Element14, ComponentLink4URL=http://www.farnell.com/datasheets/2167052.pdf?src-supplier=Element14, Composition="Thick Film", Depth=0.5mm, Features="Moisture Resistant", Height=0.016inch, Lead Free="Lead Free", Length=1mm, Manufacturer Part Number=RC0402FR-072K7L, Military Standard=Not, Number of Terminations=2, Packaging="Tape and Reel", Power Rating=63mW, Pricing 1="1=0.1, 10=0.016, 100=0.0064, 1000=0.0029, 2500=0.0025, 5000=0.0021 (USD)", REACH SVHC=Unknown, Stock 1=261850, Supplier 1=Digi-Key, Termination=SMD/SMT, Width=0.02inch, Working Voltage=50V
R48: "5.1 kOhms ±1% 0.063W, 1/16W Chip Resistor 0402 (1005 Metric) Moisture Resistant Thick Film", Case/Package=0402, Case Code (Metric)=1005, Manufacturer=Yageo, Manufacturer Part Number=RC0402FR-075K1L, Max Operating Temperature=155°C, Max Power Dissipation=63mW, Min Operating Temperature=-55°C, Package Quantity=1, Resistance=5.1kR, Supplier Part Number 1=311-5.10KLRCT-ND, Temperature Coefficient=100ppm/°C, Tolerance=1%, Voltage Rating=50V, Case Code (Imperial)=0402, ComponentLink1Description=https://www.verical.com/server-webapp/html/getDatasheet?partID=323636&src-supplier=Verical, ComponentLink1URL=https://www.verical.com/server-webapp/html/getDatasheet?partID=323636&src-supplier=Verical, ComponentLink2Description=http://www.yageo.com/documents/recent/PYu-RC_Group_51_RoHS_L_10.pdf?src-supplier=Digi-Key, ComponentLink2URL=http://www.yageo.com/documents/recent/PYu-RC_Group_51_RoHS_L_10.pdf?src-supplier=Digi-Key, ComponentLink3Description=http://www.farnell.com/datasheets/2167052.pdf?src-supplier=Element14, ComponentLink3URL=http://www.farnell.com/datasheets/2167052.pdf?src-supplier=Element14, ComponentLink4Description=http://www.yageo.com/documents/recent/PYu-RC0402_51_RoHS_L_6_r.pdf?src-supplier=Future+Electronics, ComponentLink4URL=http://www.yageo.com/documents/recent/PYu-RC0402_51_RoHS_L_6_r.pdf?src-supplier=Future+Electronics, ComponentLink5Description=http://www.yageo.com/documents/recent/PYu-RC0402_51_RoHS_L_6_r.pdf?src-supplier=Mouser, ComponentLink5URL=http://www.yageo.com/documents/recent/PYu-RC0402_51_RoHS_L_6_r.pdf?src-supplier=Mouser, ComponentLink6Description=http://www.farnell.com/datasheets/1018594.pdf?src-supplier=Element14, ComponentLink6URL=http://www.farnell.com/datasheets/1018594.pdf?src-supplier=Element14, Composition="Thick Film", Depth=0.5mm, Features="Moisture Resistant", Height=0.016inch, Lead Free="Lead Free", Length=1mm, Military Standard=Not, Number of Terminations=2, Packaging="Tape and Reel", Power Rating=63mW, Pricing 1="1=0.1, 10=0.016, 100=0.0064, 1000=0.0029, 2500=0.0025, 5000=0.0021 (USD)", REACH SVHC=Unknown, Stock 1=19803, Supplier 1=Digi-Key, Termination=SMD/SMT, Voltage Rating (DC)=50V, Width=0.02inch, Working Voltage=50V
R55: "2.26 Ohms ±1% 0.1W, 1/10W Chip Resistor 0603 (1608 Metric) Automotive AEC-Q200 Thick Film", Case/Package=0603, Case Code (Metric)=1608, Manufacturer="Vishay Dale", Manufacturer Part Number=CRCW06032R26FKEA, Max Operating Temperature=155°C, Max Power Dissipation=100mW, Min Operating Temperature=-55°C, Package Quantity=5000, Resistance=2.26R, Supplier Part Number 1=541-2.26HHCT-ND, Temperature Coefficient=100ppm/°C, Tolerance=1%, Voltage Rating=75V, Case Code (Imperial)=0603, ComponentLink1Description=http://www.vishay.com/docs/20035/dcrcwe3.pdf?src-supplier=Avnet, ComponentLink1URL=http://www.vishay.com/docs/20035/dcrcwe3.pdf?src-supplier=Avnet, Composition="Thick Film", Contact Plating=Tin, Depth=0.85mm, Features="Automotive AEC-Q200", Height=0.02inch, Lead Free="Lead Free", Length=1.55mm, Military Standard=Not, Mount="Surface Mount", Number of Terminations=2, Packaging="Tape and Reel", Power Rating=100mW, Pricing 1="1=0.1, 10=0.04, 100=0.0164, 1000=0.0074, 2500=0.0064 (USD)", Radiation Hardening=No, Stock 1=18141, Supplier 1=Digi-Key, Termination=SMD/SMT, Weight=7.1E-05oz, Width=0.85mm
R61 R62: library part "RES SMD NO BOM 0402", "Placeholder for a 0402 resistor", Case/Package=0402
TFT1: library part "CONN 0524352271 FFC TOP 22POS 0.50MM R/A", "22 Position FFC, FPC Connector Contacts, Top 0.020\" (0.50mm) Surface Mount, Right Angle", Current Rating=500mA, Flammability Rating="UL94 V-0", Manufacturer=Molex, Manufacturer Part Number=0524352271, Max Operating Temperature=85°C, Max Voltage Rating (AC)=50V, Min Operating Temperature=-40°C, Package Quantity=1, Supplier Part Number 1=WM6753CT-ND, Actuator Material=Polyphenylene, ComponentLink1Description=https://www.verical.com/server-webapp/html/getDatasheet?partID=448906&src-supplier=Verical, ComponentLink1URL=https://www.verical.com/server-webapp/html/getDatasheet?partID=448906&src-supplier=Verical, ComponentLink2Description=http://components.arrow.com/part/dataview/0323_03515907?src-supplier=Arrow+Europe, ComponentLink2URL=http://components.arrow.com/part/dataview/0323_03515907?src-supplier=Arrow+Europe, Contact Material=Bronze, Contact Plating=Gold, Depth=4.7mm, Housing Material=Nylon, Length=17.6mm, Max Voltage Rating (DC)=50V, Mount="Surface Mount", Number of Positions=22, Number of Rows=1, Orientation="Right Angle", Packaging="Tape and Reel", pin_1=LED_A, pin_2=LED_K, pin_3=IM2, pin_4=IM1, pin_5=IM0, pin_6=VDD, pin_7=DB7, pin_8=DB6, pin_9=DB5, pin_10=DB4, pin_11=DB3, pin_12=DB2, pin_13=DB1, pin_14=DB0, pin_15=RD, pin_16=WR, pin_17=RS, pin_18=CS, pin_19=TE, pin_20=RESET, pin_21=SDA, pin_22=GND, pin_23=MNT, pin_24=MNT, Pitch=0.5mm, Pricing 1="1=2.18, 10=1.978, 25=1.8564, 50=1.7758, 100=1.6951, 250=1.5337, 500=1.4126 (USD)", Radiation Hardening=No, Stock 1=4239, Supplier 1=Digi-Key, Termination=Solder, Voltage Rating=50V, Wire/Cable Type=Straight
TP1 TP2 TP3 TP4 TP5 TP6 TP7 TP8 TP9 TP10 TP11 TP12 TP13 TP14 TP15: "Test Point. There is nothing to buy or mount.", Manufacturer=N/A, ClassName=TestPoint, CompType=TestPoint, MountType=N/A, PackageReference=TetsPoint, PartNumber=N/A
U1: "32.768kHz XO (Standard) LVCMOS Oscillator 1.5V ~ 3.63V  4-SMD, No Lead", Case/Package=SMD/SMT, Current Rating=1.35uA, Frequency=32.768kHz, Frequency Stability=100ppm, Load Capacitance=10pF, Manufacturer=SiTime, Manufacturer Part Number=SIT1533AI-H4-DCC-32.768E, Max Operating Temperature=85°C, Max Supply Current=1.4uA, Max Supply Voltage=3.63V, Min Operating Temperature=-40°C, Min Supply Voltage=1.5V, Package Quantity=1000, Supplier Part Number 1=1473-1239-1-ND, ClassName=MCU, ComponentLink1Description=https://www.sitime.com/datasheet/SiT1533?src-supplier=Digi-Key, ComponentLink1URL=https://www.sitime.com/datasheet/SiT1533?src-supplier=Digi-Key, ComponentLink2Description=http://www.mouser.com/ds/2/371/SiT1533-datasheet-275337.pdf?src-supplier=Mouser, ComponentLink2URL=http://www.mouser.com/ds/2/371/SiT1533-datasheet-275337.pdf?src-supplier=Mouser, ComponentLink3Description=http://components.arrow.com/part/dataview/0323_07137603?src-supplier=Arrow+Europe, ComponentLink3URL=http://components.arrow.com/part/dataview/0323_07137603?src-supplier=Arrow+Europe, Height=0.024inch, Length=0.079inch, Max Duty Cycle=52%, Mount="Surface Mount", Number of Pins=4, Packaging="Tape and Reel", Pricing 1="1=1.1, 10=0.975, 50=0.9116, 100=0.8056, 500=0.7632 (USD)", RoHS Compliant=Yes, Stock 1=89278, Supplier 1=Digi-Key, Termination=SMD/SMT, Width=0.047inch
U2 U11: library part "IC TXS0102 TRNSLTR BIDIRECTIONAL 8X2SON", "2-Bit Bidirectional Voltage-Level Translator for Open-Drain Application", High Level Output Current=-20uA, Low Level Output Current=1mA, Manufacturer="Texas Instruments", Max Operating Temperature=85°C, Max Supply Voltage=5.5V, Min Operating Temperature=-40°C, Min Supply Voltage=1.65V, Package Quantity=1, Quiescent Current=14.4uA, Supplier Part Number 1=296-28435-1-ND, ComponentLink1Description=https://www.verical.com/server-webapp/html/getDatasheet?partID=544149&src-supplier=Verical, ComponentLink1URL=https://www.verical.com/server-webapp/html/getDatasheet?partID=544149&src-supplier=Verical, ComponentLink2Description=http://www.ti.com/general/docs/suppproductinfo.tsp?distId=10&gotoUrl=http%3A%2F%2Fwww.ti.com%2Flit%2Fgpn%2Ftxs0102&src-supplier=Digi-Key, ComponentLink2URL=http://www.ti.com/general/docs/suppproductinfo.tsp?distId=10&gotoUrl=http%3A%2F%2Fwww.ti.com%2Flit%2Fgpn%2Ftxs0102&src-supplier=Digi-Key, Contact Plating=Gold, Data Rate=24Mbps, Height=0.35mm, Lead Free="Lead Free", Length=1.85mm, Logic Function=Translator, Manufacturer Part Number=TXS0102DQMR, Mount="Surface Mount", Number of Bits=2, Number of Channels=2, Number of Inputs=2, Number of Pins=8, Output Type=Voltage, Packaging="Tape and Reel", Pricing 1="1=0.69, 10=0.611, 25=0.5736, 100=0.4681, 250=0.4348, 500=0.37, 1000=0.296 (USD)", Propagation Delay=260ns, Radiation Hardening=No, REACH SVHC="No SVHC", Stock 1=53273, Supplier 1=Digi-Key, Turn-On Delay Time=4.6ns, Width=1.25mm
U3: library part "IC CP2102N USB TO UART BRIDGE QFN28", "USB Bridge, USB to UART USB 2.0 UART Interface 28-QFN (5x5)", Manufacturer="Silicon Labs", Supplier Part Number 1=336-5890-1-ND, ComponentLink1Description=https://4donline.ihs.com/images/VipMasterIC/IC/SILC/SILC-S-A0007770867/SILC-S-A0007770867-1.pdf?hkey=6D3A4C79FDBF58556ACFDE234799DDF0&src-supplier=Farnell, ComponentLink1URL=https://4donline.ihs.com/images/VipMasterIC/IC/SILC/SILC-S-A0007770867/SILC-S-A0007770867-1.pdf?hkey=6D3A4C79FDBF58556ACFDE234799DDF0&src-supplier=Farnell, Manufacturer Part Number=CP2102N-A02-GQFN28R, Pricing 1="1=1.4, 25=1.3516, 100=1.2995 (USD)", Stock 1=3461, Supplier 1=Digi-Key
U4: library part "IC PCAL9539AHF,128 I/O EXPANDER 16BIT 24HWQFN", "I/O Expander with interrupt and reset 16 I²C 400kHz 24-HWQFN (4x4)", Input Voltage="1.65 V to 5.5 V", Manufacturer="NXP Semiconductors", Maximum Clock Frequency="100 kHz", Maximum Operating Temperature="+ 85 C", Minimum Operating Temperature="- 40 C", Operating Supply Current="160 mA", Output Current="25 mA", Output Voltage="6.5 V", Package / Case=HWQFN-24, Pd - Power Dissipation="200 mW", Supplier Part Number 1=771-PCAL9539AHF,128, 7B_I2C_ADDR="0b11101XX (0x74..0x77)", Brand="NXP Semiconductors", Category="Interface - I/O Expanders", ComponentLink1Description=https://www.mouser.com/datasheet/2/302/PCAL9539A-1127729.pdf, ComponentLink1URL=https://www.mouser.com/datasheet/2/302/PCAL9539A-1127729.pdf, Logic Type="I2C, SMBus", Manufacturer Part Number=PCAL9539AHF,128, Minimum Order Quantity=1, Mount="Surface Mount", Mounting Style=SMD/SMT, Operating Supply Voltage="1.65 V to 5.5 V", Packaging="Cut Tape", Pricing 1="1=2.11, 10=1.79, 100=1.25, 500=1.21, 1000=0.968, 2500=0.932, 6000=0.896 (USD)", Product="I/O Expanders", Product Type="I/O Expanders", Reeling=True, RoHS="RoHS Compliant", RoHS - Mouser=Y, Standard Pack Qty=6000, Stock 1=4265, Subcategory="Interface ICs", Supplier 1=Mouser, Type="I/O Expander"
U5 U6: library part "IC IM69D130 MICROPHONE MEMS DIGITAL PDM OMNI", "20Hz ~ 20kHz Digital, PDM Microphone MEMS (Silicon) 1.62V ~ 3.6V Omnidirectional (-36dB ±1dB @ 94dB SPL) Solder Pads", Manufacturer=Infineon, Max Frequency=3.3MHz, Operating Supply Current=1.3mA, Operating Supply Voltage=-3.6V, Supplier Part Number 1=IM69D130V01XTSA1CT-ND, ComponentLink1Description=http://www.farnell.com/datasheets/2718732.pdf?src-supplier=Newark, ComponentLink1URL=http://www.farnell.com/datasheets/2718732.pdf?src-supplier=Newark, ComponentLink2Description=https://www.infineon.com/dgdl/Infineon-IM69D130-DS-v01_00-EN.pdf?fileId=5546d462602a9dc801607a0e46511a2e&src-supplier=Digi-Key, ComponentLink2URL=https://www.infineon.com/dgdl/Infineon-IM69D130-DS-v01_00-EN.pdf?fileId=5546d462602a9dc801607a0e46511a2e&src-supplier=Digi-Key, ComponentLink3Description=http://www.farnell.com/datasheets/2718732.pdf?src-supplier=Farnell, ComponentLink3URL=http://www.farnell.com/datasheets/2718732.pdf?src-supplier=Farnell, Direction=Omnidirectional, Halogen Free="Halogen Free", Lead Free="Lead Free", Manufacturer Part Number=IM69D130V01XTSA1, Output Type=Digital, Packaging="Cut Tape", Pricing 1="1=1.76, 10=1.458, 25=1.3476, 50=1.2674, 100=1.19, 500=1.0214 (USD)", RoHS Compliant=Yes, Shape=Rectangular, Stock 1=16861, Supplier 1=Digi-Key, Termination=Solder
U7: library part "IC CMX655DQ6-TR1K VOICE CODEC 16BIT 24VQFN", "Voice-Band Interface 16 b I²S, PCM, SPI 24-VQFN (4x4)", Case/Package=VQFN, Manufacturer="CML Microcircuits", Supplier Part Number 1=226-CMX655DQ6, ComponentLink1Description=https://www.cmlmicro.com/wp-content/uploads/2018/10/CMX655_ds.pdf?src-supplier=Digi-Key, ComponentLink1URL=https://www.cmlmicro.com/wp-content/uploads/2018/10/CMX655_ds.pdf?src-supplier=Digi-Key, Manufacturer Part Number=CMX655DQ6, Mount="Surface Mount", Packaging="Cut Tape", Pricing 1="1=1.41, 10=1.41, 50=1.36, 100=1.22, 1000=1.07, 10000=1.01 (USD)", Stock 1=164, Supplier 1=Mouser, Supplier 2=Digi-Key, Supplier Part Number 2=2032-1036-1-ND
U8 U18: library part "IC TPSM82822SIL 5.5-V INPUT, 2-A STEP-DOWN MODUL", "Non-Isolated PoL Module DC DC Converter 1 Output 0.6 ~ 4V    2A 2.4V - 5.5V Input", Manufacturer="Texas Instruments", Supplier Part Number 1=296-TPSM82822SILRCT-ND, ComponentLink1Description=https://octopart.com/click/track?ai=10049&ct=datasheets&sig=01db677&at=physicalpart&sid=370&ppid=108054084&hlid=30259078&src-supplier=TI+store, ComponentLink1URL=https://octopart.com/click/track?ai=10049&ct=datasheets&sig=01db677&at=physicalpart&sid=370&ppid=108054084&hlid=30259078&src-supplier=TI+store, Manufacturer Part Number=TPSM82822SILR, Pricing 1="1=2.81, 10=2.523, 25=2.3848, 100=1.961, 250=1.7596, 500=1.696, 1000=1.4098 (USD)", Stock 1=2595, Supplier 1=Digi-Key
U9: library part "IC MAX30102EFD+T INTEGRATED OPTICAL SENSOR", "Oximeter/Heart Rate Sensor I²C Output", Manufacturer=Maxim, Max Operating Temperature=85°C, Min Operating Temperature=-40°C, Supplier Part Number 1=MAX30102EFD+TCT-ND, ComponentLink1Description=https://datasheets.maximintegrated.com/en/ds/MAX30102.pdf?src-supplier=Digi-Key, ComponentLink1URL=https://datasheets.maximintegrated.com/en/ds/MAX30102.pdf?src-supplier=Digi-Key, Manufacturer Part Number=MAX30102EFD+T, Output Type=I2C, Pricing 1="1=9.76, 10=8.815, 25=8.61 (USD)", RoHS Compliant=Yes, Stock 1=4064, Supplier 1=Digi-Key
U10: library part "IC LDLN025J18R REG LIN 1.8V 250MA 4FLIPCHIP", "Linear Voltage Regulator IC  1 Output  250mA 4-FlipChip", Dropout Voltage=250mV, Manufacturer=STMicroelectronics, Max Operating Temperature=125°C, Min Operating Temperature=-40°C, Output Current=250mA, Output Voltage=1.8V, Supplier Part Number 1=497-16899-1-ND, ComponentLink1Description=http://www.st.com/content/ccc/resource/sales_and_marketing/promotional_material/brochure/group0/cb/7a/af/56/f7/bd/47/e9/Brochure%20Power%20management%20guide/files/Brochure_Power_Management.pdf/jcr:content/translations/en.Brochure_Power_Management.pdf?src-supplier=Digi-Key, ComponentLink1URL=http://www.st.com/content/ccc/resource/sales_and_marketing/promotional_material/brochure/group0/cb/7a/af/56/f7/bd/47/e9/Brochure%20Power%20management%20guide/files/Brochure_Power_Management.pdf/jcr:content/translations/en.Brochure_Power_Management.pdf?src-supplier=Digi-Key, Manufacturer Part Number=LDLN025J18R, Number of Regulators=1, Pricing 1="1=0.65, 10=0.556, 25=0.5192, 100=0.3858, 250=0.3265, 500=0.3116, 1000=0.23 (USD)", RoHS Compliant=Yes, Stock 1=4800, Supplier 1=Digi-Key